# Altium PCB B212.PcbDoc
Units mm, origin at the board's own origin, x right, y up, seen from the top; angles counter-clockwise.
Board outline 40 x 22 mm, 4 copper layers (Top, Layer 1, Layer 2, Bottom), stack 1.564 mm thick; 17 components, 23 nets, 97 pads, 228 vias.
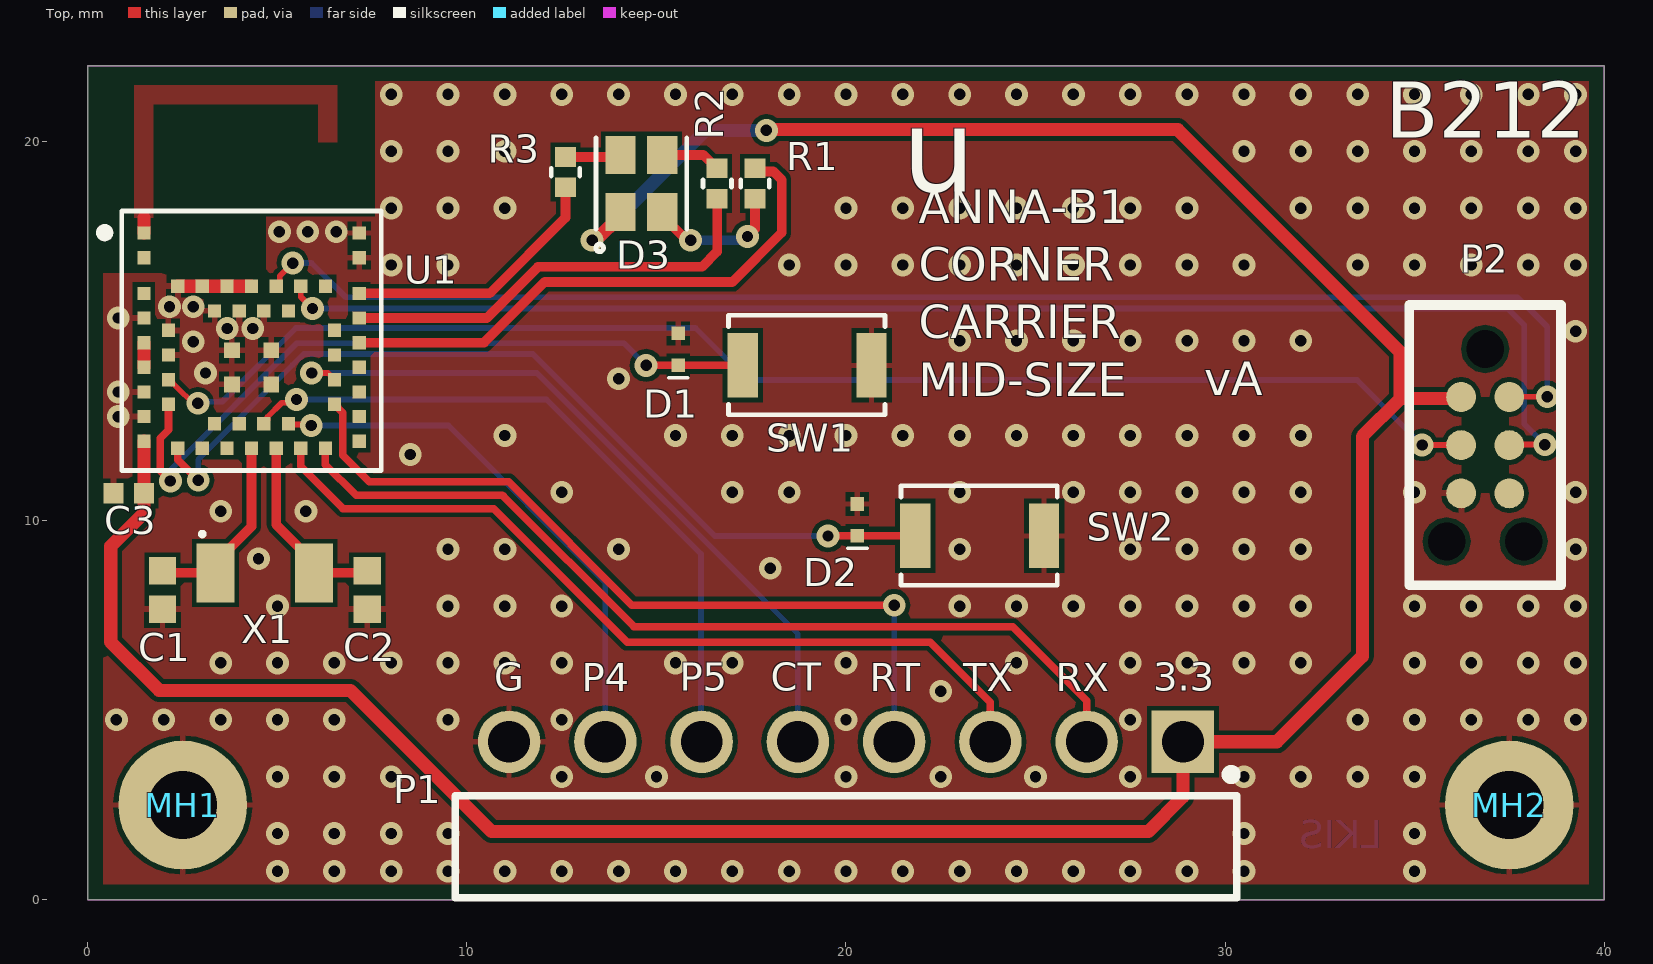
[diagram p0: Top view]
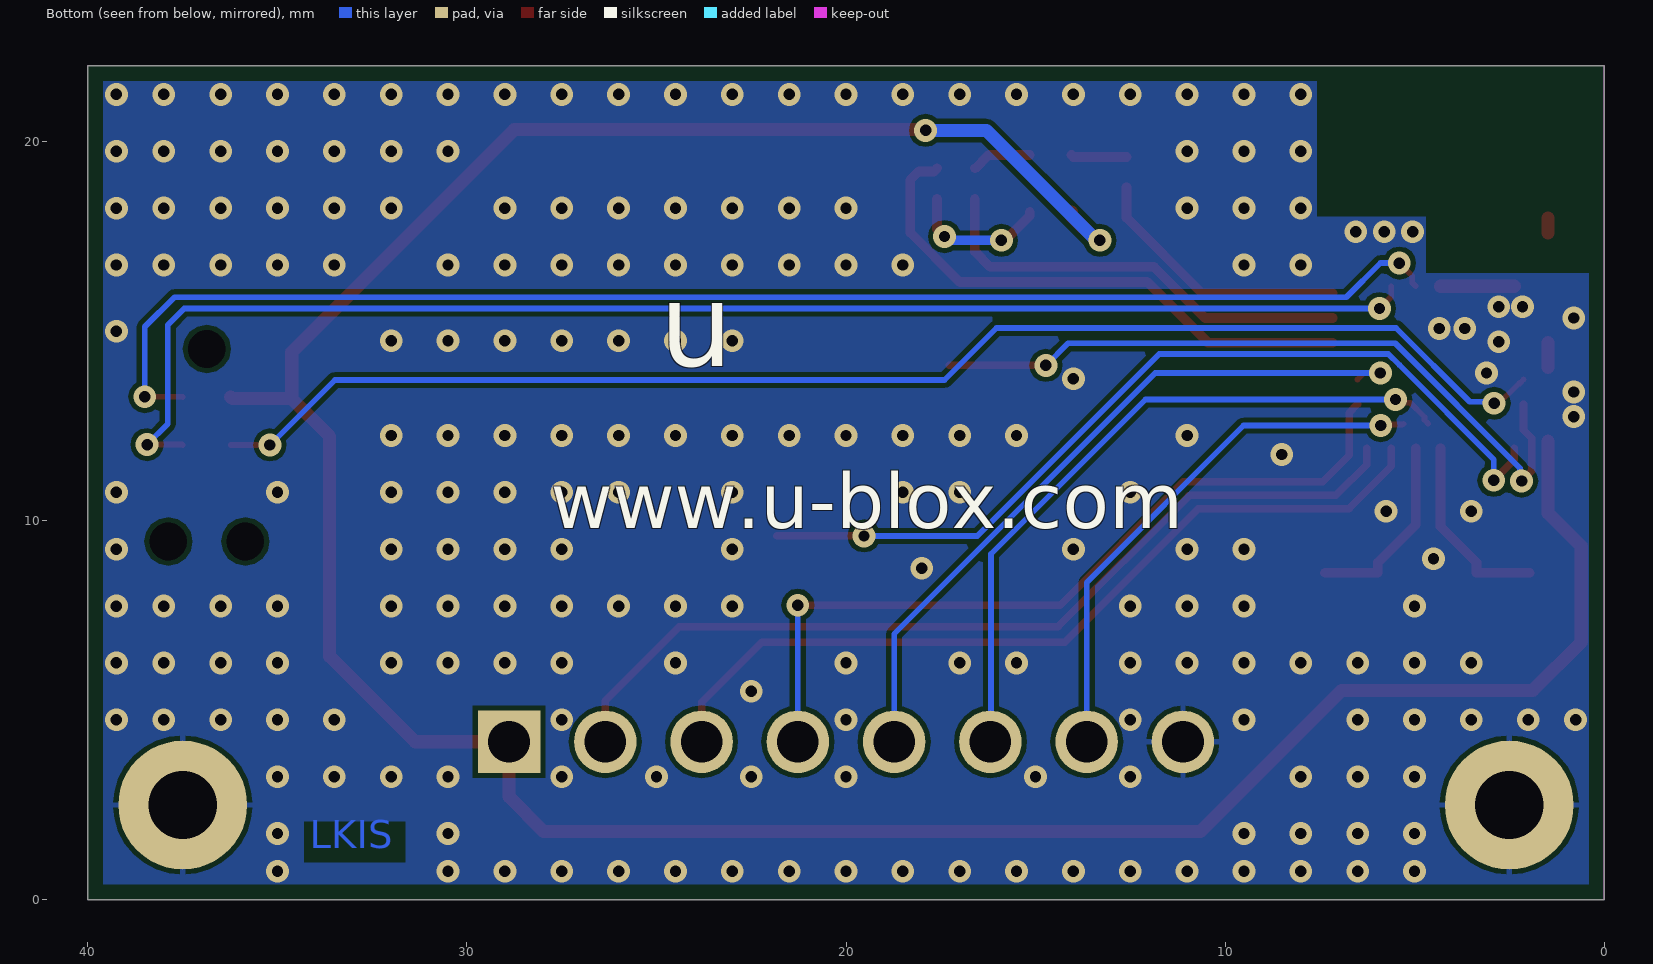
[diagram p1: Bottom view, seen from below]
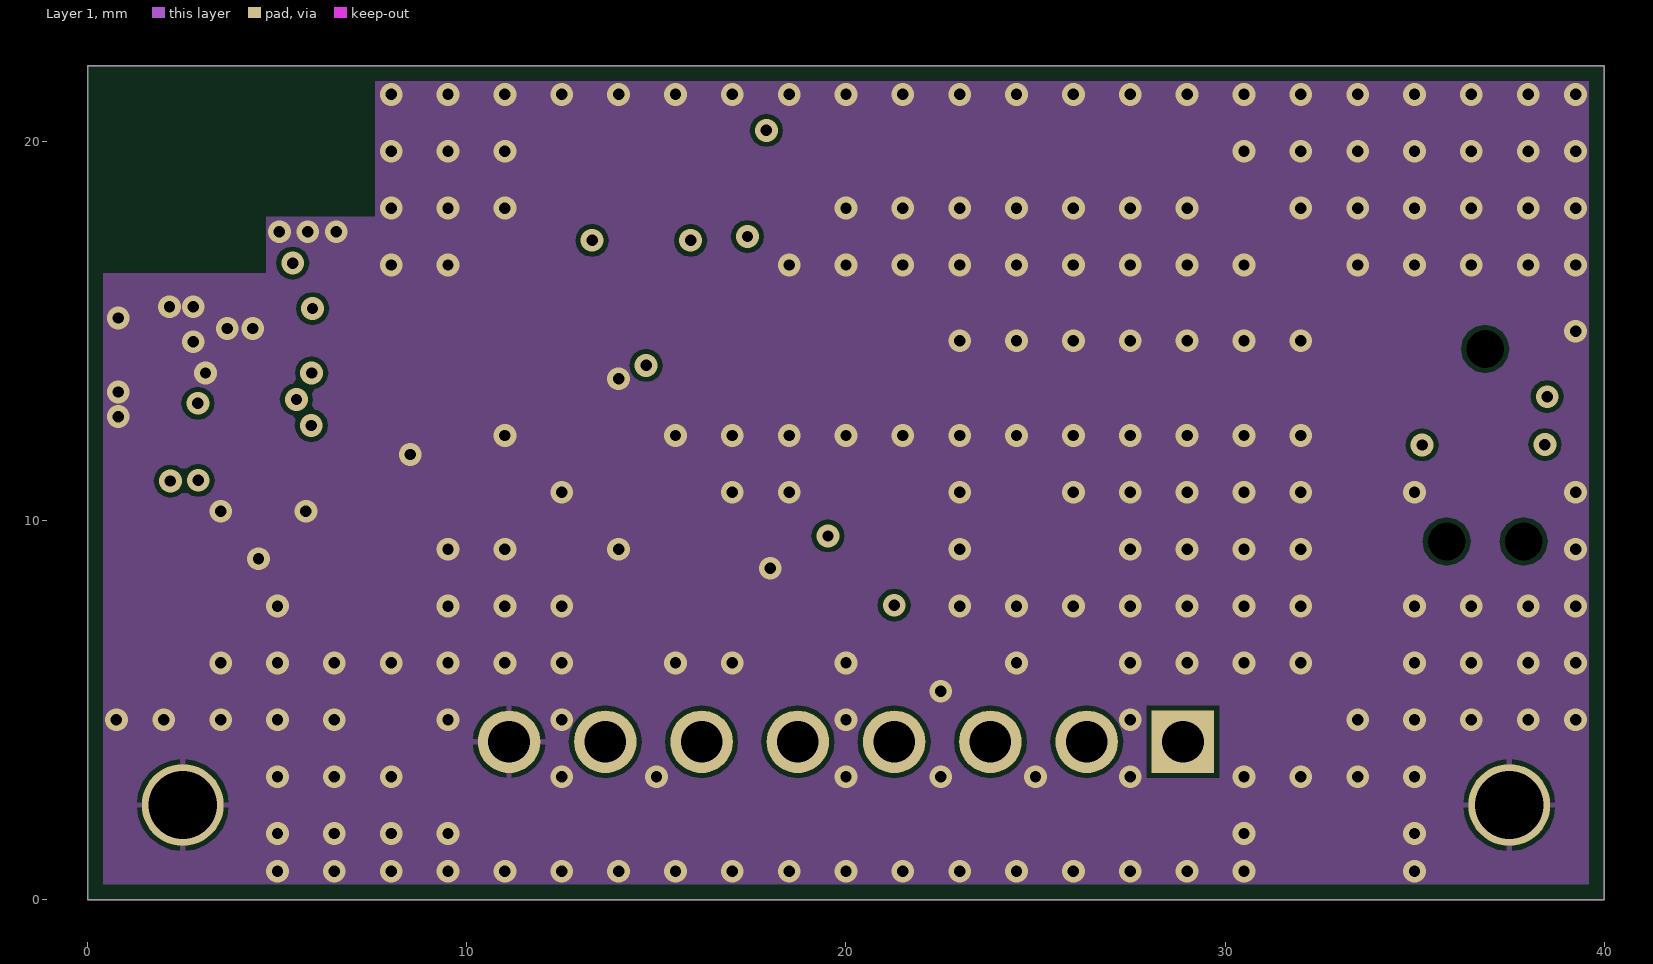
[diagram p2: Layer 1]
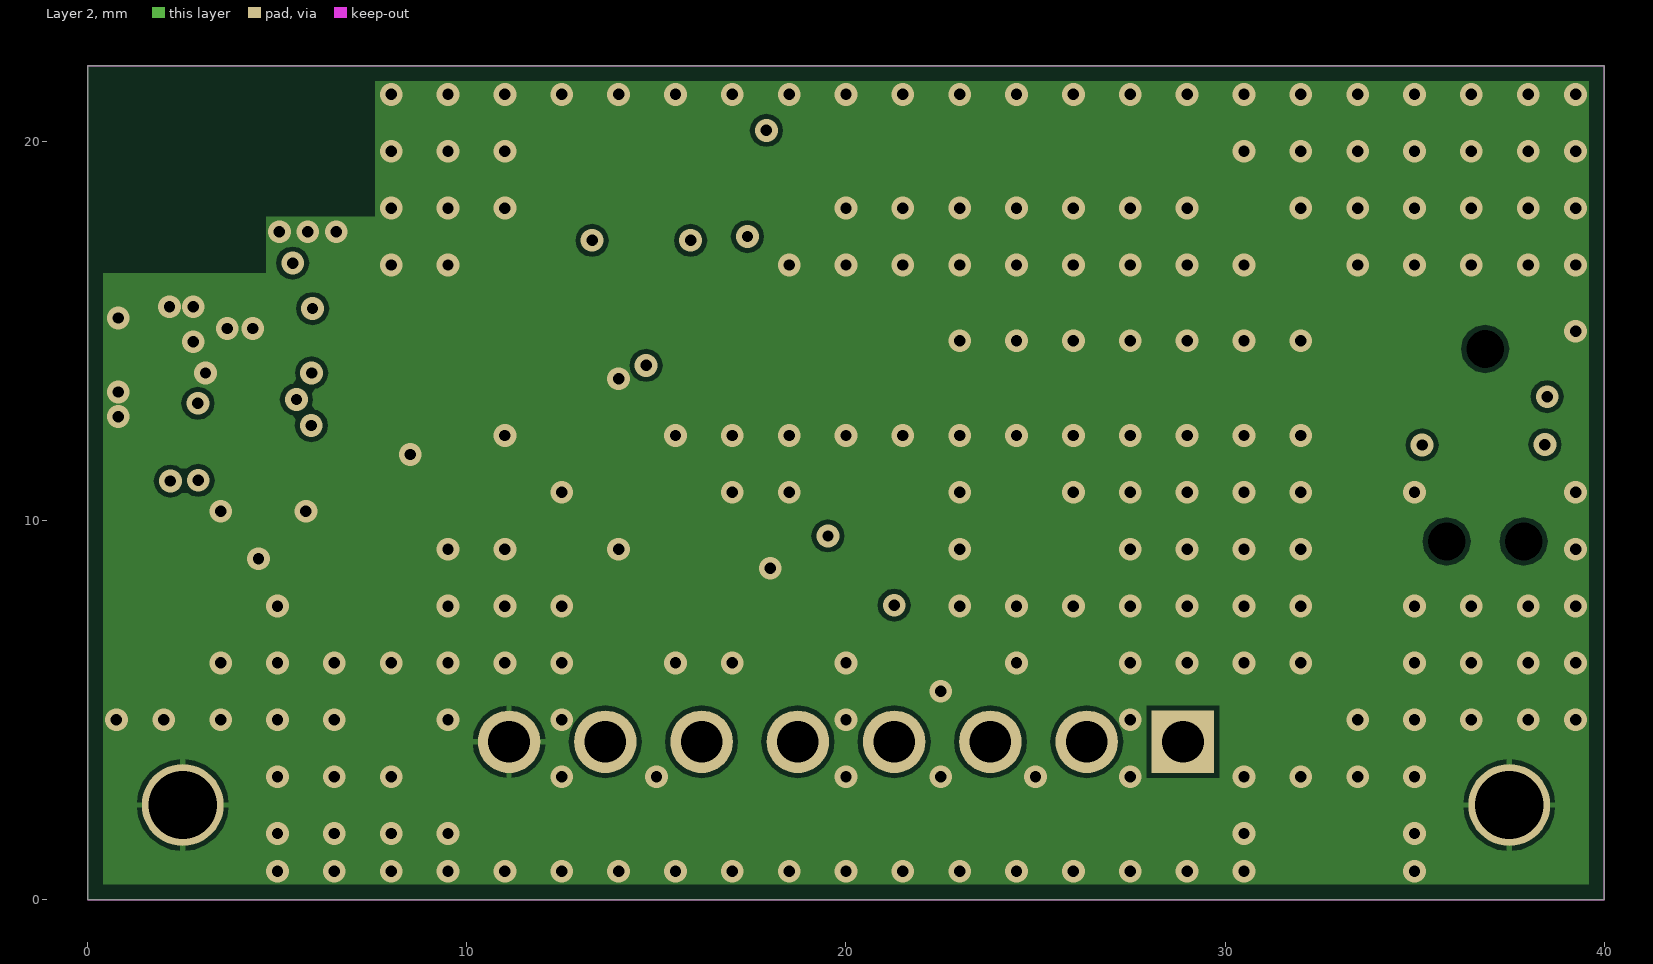
[diagram p3: Layer 2]

## Layer stack, top to bottom
Top Solder: solder mask 0.0203, Solder Resist, Dk 3.5
Top: signal copper 0.0406
Dielectric 1: prepreg 0.0711, PP-006, Dk 4.1
Layer 1: signal copper 0.035
Core: core 1.27, Core-043, Dk 4.3
Layer 2: signal copper 0.035
Dielectric 2: prepreg 0.0711, PP-006, Dk 4.1
Bottom: signal copper 0.0406
Bottom Solder: solder mask 0.0203, Solder Resist, Dk 3.5

## Board outline
0,22 40,22 40,0 0,0

## Design rules (kind name [scope] priority, off if disabled: settings)
BoardOutlineClearance [All] p1: gap=0.4 ignorepadtopadclearanceinfootprint=FALSE
Clearance "Stitching GND" [IsStitchingVia and InNet('GND') vs (IsVia and (Not IsStitchingVia)) Or IsPad] p1: gap=0.127 ignorepadtopadclearanceinfootprint=TRUE
Clearance Clearance_Poly [InPolygon vs OnLayer('Keep-Out Layer') OR (OnLayer('Multi-Layer') AND IsPad  AND Not(PadIsPlated))] p2: gap=0.127 ignorepadtopadclearanceinfootprint=TRUE
Clearance [All] p3: gap=0.127 ignorepadtopadclearanceinfootprint=FALSE except(0: Arc-Text Arc-Hole Track-Text Track-Hole SMDPad-Text SMDPad-Hole THPad-Text THPad-Hole Via-Text Via-Hole Fill-Text Fill-Hole Poly-Text Poly-Hole Region-Text Region-Hole Text-Text Text-Hole)
ComponentClearance [All] p1: gap=0.127 collisioncheckmode=3 verticalgap=0.254 showdistances=FALSE
DiffPairsRouting .14 [All] p1: maxlimit=0.254 minlimit=0.1 mostfreqgap=0.254 toplayer_maxgap=0.1 toplayer_prefgap=0.1 toplayer_minwidth=0.1 toplayer_maxwidth=0.1 toplayer_prefwidth=0.1 midlayer1_mingap=0.254 midlayer1_minwidth=0.381 midlayer1_maxwidth=0.381 midlayer1_prefwidth=0.381 midlayer2_mingap=0.254 midlayer2_minwidth=0.381 midlayer2_maxwidth=0.381 midlayer2_prefwidth=0.381 bottomlayer_maxgap=0.1 bottomlayer_prefgap=0.1 bottomlayer_minwidth=0.1 bottomlayer_maxwidth=0.1 bottomlayer_prefwidth=0.1 maxuncoupledlength=12.7
Height [All] p1: minheight=0 maxheight=25.4 prefheight=2.54
HoleSize [All] p1: absolutevalues=TRUE maxlimit=2540 minlimit=0.127 maxpercent=80.000 minpercent=20.000
HoleToHoleClearance [All] p1: gap=0.152 allowstackedmicrovias=TRUE
MinimumSolderMaskSliver [All] p1: minsoldermaskwidth=0.025
PlaneClearance [InPoly] p1: clearance=0.254
PlaneConnect [All] p1: pad.planeconnectstyle=Relief pad.reliefexpansion=0.508 pad.reliefentries=4 pad.reliefconductorwidth=0.254 pad.reliefairgap=0.254 via.planeconnectstyle=Direct via.reliefexpansion=0.508 via.reliefentries=4 via.reliefconductorwidth=0.254 via.reliefairgap=0.254
PolygonConnect ThermalVias [IsVia] p1: connectstyle=Direct reliefconductorwidth=0.254 reliefentries=4 polygonreliefangle="90 Angle" airgapwidth=0.254
PolygonConnect "PolygonConnect - Power" [InNetClass('')] p2: connectstyle=Relief reliefconductorwidth=0.254 reliefentries=4 polygonreliefangle="90 Angle" airgapwidth=0.127
PolygonConnect PolygonConnect-BGA [InComponentClass('')] p3: connectstyle=Relief reliefconductorwidth=0.152 reliefentries=4 polygonreliefangle="45 Angle" airgapwidth=0.152
PolygonConnect PolygonConnect-General [All] p4: connectstyle=Relief reliefconductorwidth=0.152 reliefentries=4 polygonreliefangle="90 Angle" airgapwidth=0.127
RoutingLayers [All] p1: top layer_v5=TRUE mid layer 1_v5=FALSE mid layer 2_v5=TRUE bottom layer_v5=TRUE
RoutingVias [All] p1: holewidth=0.3 width=0.6 viastyle="Through Hole" minholewidth=0.2 minwidth=0.5 maxholewidth=7 maxwidth=1
SMDEntry [All] p1 off: side=TRUE corner=TRUE anyangle=TRUE
SilkToBoardRegionClearance [All] p1 off:
SilkToSilkClearance [All] p1 off: silktosilkclearance=0.025
SilkToSolderMaskClearance [IsPad] p1 off: minsilkscreentomaskgap=0 clearancetoexposedcopper=TRUE
SolderMaskExpansion SolderMaskExpansion_via [IsVia] p1: expansion=-0.254 istentingtop=TRUE
SolderMaskExpansion [All] p2: expansion=0.05 istentingtop=FALSE
UnRoutedNet [All] p1: checkbadconnections=TRUE
ViasUnderSMD [All] p1: allowed=FALSE
Width [All] p1: maxlimit=2.54 minlimit=0.127 preferedwidth=0.152 toplayer_maxwidth=1 toplayer_prefwidth=0.152 bottomlayer_maxwidth=1 bottomlayer_prefwidth=0.152 minimp=50.000000 maximp=50.000000 favimp=50.000000
Width Width_1 [All] p2: maxlimit=0.254 minlimit=0.254 preferedwidth=0.254
17 further rules are at their usual default settings.

## Components (designator, comment, footprint, x,y, rotation, side; value= is the part's Value field where it differs from the comment)
C1 "Capacitor 10 pF +/- 5% 50 V 0402" CAPC1005X55X25ML05T05 1.965,8.175 r270 top value=10pF
C2 "Capacitor 10 pF +/- 5% 50 V 0402" CAPC1005X55X25ML05T05 7.365,8.175 r270 top value=10pF
C3 "UBXH01-00002434U7" "Cap 0402 HD" 1.075,10.725 r180 top value=4U7
D1 "110-00019" SOD-923 15.575,14.525 r90 top
D2 "110-00019" SOD-923 20.3,10.025 r90 top
D3 "115-00011" 4-PLCC 14.6,18.9 r270 top
MH1 "MH_M1.5DNP" MH_M1.5 2.5,2.5 r0 top
MH2 "MH_M1.5DNP" MH_M1.5 37.5,2.5 r0 top
P1 "61300811021" 61300811021 20,1.4 r0 top
P2 "TC2030-IDC-NLDNP" TC2030-IDC-NL 36.865,14.535 r270 top
R1 "180-00031499R" "RES 0402 HD" 17.6,18.9 r270 top value=499R
R2 "180-00098220R" "RES 0402 HD" 16.6,18.9 r90 top value=220R
R3 "180-00098220R" "RES 0402 HD" 12.6,19.2 r90 top value=220R
SW1 "135-00007" B3U-1000P 18.975,14.1 r0 top
SW2 "135-00007" B3U-1000P 23.525,9.6 r0 top
U1 "ANNA-B112-OPENCPU" ANNA_LGA52S_650X650 4.315,14.752 r0 top
X1 "100-00005" XTAL_3215 4.665,8.625 r0 top

## Footprints (in the part's own frame and the unit in brackets; to place one, negate y for a bottom-side part, rotate by r counter-clockwise, add the part's x,y. Pads: shape width x height; smd on the part's side, far side on the other; paste and mask are expansions set on the pad)
4-PLCC [mm] "4 Pin Plastic Leaded Chip Carrier, 2mm x 2mm"
  rect 1x0.8 smd: 1(0.75,-0.55) 2(-0.75,-0.55) 3(-0.75,0.55) 4(0.75,0.55)
  silkscreen extent -1.2,-1.2 1.8,1.2, body extent -1.05,-1.05 1.05,1.05, height 1.01
61300811021 [mm]
  rect 1.65x1.65 hole 1.1: 1(8.89,2.77)
  round 1.65 hole 1.1: 2(6.35,2.77) 3(3.81,2.77) 4(1.27,2.77) 5(-1.27,2.77) 6(-3.81,2.77) 7(-6.35,2.77) 8(-8.89,2.77)
  silkscreen extent -10.31,-1.35 10.31,2.03, body extent -10.16,-7.27 10.16,3.09, height 2.58
ANNA_LGA52S_650X650 [mm]
  rect 0.35x0.35 smd paste+0 mask+0.05: 1(-2.84,2.84) 2(-2.84,2.19) 3(-2.84,1.248) 4(-2.84,0.598) 5(-2.84,-0.052) 6(-2.84,-0.702) 7(-2.84,-1.352) 8(-2.84,-2.002) 9(-2.84,-2.652) 10(-2.19,0.273) 11(-2.19,-0.377) 12(-2.19,-1.027) 13(-2.19,-1.677) 14(-1.95,-2.84) 15(-1.3,-2.84) 17(0,-2.84) 18(0.65,-2.84) 20(1.95,-2.84) 21(-0.975,-2.19) 23(0.325,-2.19) 24(0.975,-2.19) 25(2.84,-2.652) 26(2.84,-2.002) 27(2.84,-1.352) 28(2.84,-0.702) 29(2.84,-0.052) 30(2.84,0.598) 31(2.84,1.248) 32(2.84,2.19) 33(2.84,2.84) 34(2.19,-1.677) 35(2.19,-1.027) 36(2.19,-0.377) 37(2.19,0.273) 38(1.95,1.435) 39(1.3,1.435) 40(0.65,1.435) 41(0,1.435) 42(-0.65,1.435) 43(-1.3,1.435) 44(-1.95,1.435) 46(0.325,0.785) 48(-0.975,0.785)
  rect 0.35x0.35 smd mask+0.05: 16(-0.65,-2.84) 19(1.3,-2.84) 22(-0.325,-2.19) 45(0.975,0.785) 47(-0.325,0.785)
  rect 0.42x0.42 smd paste+0 mask+0.05: 49(-0.52,-0.252) 50(-0.52,-1.152) 51(0.52,-1.152) 52(0.52,-0.252)
  silkscreen extent -3.97,-3.42 3.42,3.43, body extent -3.25,-3.25 3.25,3.25, height 1.2
B3U-1000P [mm] "Button Tactile, SMT 4mm x 2.5mm, height 1.2mm"
  rect 0.8x1.7 smd: 1(-1.7,0) 2(1.7,0)
  silkscreen extent -2.07,-1.3 2.05,1.33, body extent -2,-1.25 2,1.25, height 1.6
"Cap 0402 HD" [mm] "Chip Capacitor, 2-Leads, Body 1.00x0.50mm, IPC High Density"
  rect 0.52x0.55 smd: 1(-0.4,0) 2(0.4,0)
  body extent -0.55,-0.3 0.55,0.3, height 0.6
CAPC1005X55X25ML05T05 [mm] "Chip Capacitor, 2-Leads, Body 1.05x0.55mm, IPC Low Density"
  rect 0.72x0.72 smd: 1(-0.51,0) 2(0.51,0)
  body extent -0.53,-0.28 0.53,0.28, height 0.55
MH_M1.5 [mm] "Mounting Hole M1.5 Metric, 3.4mm diameter pad"
  round 3.4 / inner round 2.159 / far side round 3.4 hole 1.8: 1(0,0)
"RES 0402 HD" [mm] "Chip Resistor, 2-Leads, Body 1.05x0.54mm, IPC High Density"
  rect 0.52x0.55 smd: 1(-0.4,0) 2(0.4,0)
  silkscreen extent -0.1,-0.38 0.1,0.38, body extent -0.55,-0.3 0.55,0.3, height 0.4
SOD-923 [mm] "SOD-923, 2-Leads, Body 1.25x2.50mm, IPC High Density,"
  rect 0.36x0.35 smd mask+0.05: 1(-0.42,0) 2(0.42,0)
  silkscreen extent -0.75,-0.25 -0.75,0.25, body extent -0.4,-0.3 0.4,0.3, height 0.4
TC2030-IDC-NL [mm] "Tag-Connect 6-Pin No Legs"
  round 0.9 hole 0.995 unplated: 0(0,0) 0(5.08,-1.016) 0(5.08,1.016)
  round 0.79 smd paste-0.39: 1(1.27,-0.635) 2(1.27,0.635) 3(2.54,-0.635) 4(2.54,0.635) 5(3.81,-0.635) 6(3.81,0.635)
  silkscreen extent -1.16,-2 6.24,2
XTAL_3215 [mm] "XTAL, 2-Leads, Body 1.50x3.20mm"
  rect 1x1.55 smd: 1(-1.3,0) 2(1.3,0)
  silkscreen extent -1.7,0.98 -1.6,1.07, body extent -1.65,-0.8 1.65,0.8, height 0.9

## Part data
C1 C2: library part CMP-001-00013-4, "Chip Capacitor, 10 pF, +/- 5%, 50 V, 0402 (1005 Metric)", Capacitor Type=Ceramic, Case/Package=0402, Max Operating Temperature=125°C, Min Operating Temperature=-55°C, Tolerance=5%, Voltage Rating=50V, Mounting Technology=SM, Pins=2, RoHS Compliant=True
C3: library part UBXH01-0000243, "CAP CER X5R 0402", Manufacturer="Murata Manufacturing Company, Ltd.", Manufacturer 2=None, Manufacturer P/N=GRM155R61A475MEAA, Max Operating Temp=85°C, Max Voltage=10.0V, Min Operating Temp=-40°C, Tolerance=20%, Automotive=None, Critical=None, Editor=dario.antonaz, Env=ROHS, Manufacturer 3=None, Manufacturer P/N 2=None, Manufacturer P/N 3=None, Max Current=None, Max Power=None, Mfg P/N Datasheet=https://wiki.u-blox.com/bin/view/Generic/Docs/DocumentSummary?index=24302, Mfg P/N Datasheet 2=None, Mfg P/N Datasheet 3=None, Mfg P/N Released=Yes, Mfg P/N Released 2=None, Mfg P/N Released 3=None, Mfg P/N Split=100, Mfg P/N Split 2=None, Mfg P/N Split 3=None, Mfg P/N Status=Active, Mfg P/N Status 2=None, Mfg P/N Status 3=None, Part Number=UBXH01-0000243, Part Type=Capacitor, Perferred=PREF, Permitted Use="Volume Products", RefDes=C, Release Data="2016-03-17 10:02:21.014314", Released by=pasquale.scorca, Single Source=None, Size=0x0y, UBX Wiki=https://wiki.u-blox.com/bin/view/Operations/PartDetails?index=24303
D1 D2: "Diode, ESD9B, 3.3V, ST5G, SOD-923", Manufacturer="ON Semiconductor", Manufacturer P/N=ESD9B3.3ST5G, MFG Package=SOD-923, Package Type=SOD, Part Name="Diode TVS 3.3V SOD-923", Voltage=3.3V, Arena Link=https://app.bom.com/a/4M5DJQ9Q9SR7DV4H?v=spec.summary, Body Size="0.8mm x 0.6mm", Component Mounting Type=SMT, Diode Type=TVS, Height=0.4mm, Item_Phase=Production, Part Number=110-00019, Part_Type=Diode, Pins=2, Revision=0A, Supplier 1=Arrow, Supplier Part Number 1=ESD9B3.3ST5G, Use in new designs=Yes
D3: "LED, RGB Diffused SMT, PLCC4 4 Pin", Color=RGB, Current="20mA Red, 10mA Green, 10mA, Blue", Manufacturer="Cree, Inc.", Manufacturer P/N=CLMVB-FKA-CFHEHLCBB7a363, MFG Package=PLCC4, Package Type=Custom, Part Name="LED RGB SMT 2mm x 2mm", Supplier Part Number 1=941-CLMVBFKACFHEHLCB, Voltage=5V, Arena Link=https://app.bom.com/a/UCV39GZGZIHY581D?v=spec.summary, Body Size="2.0mm x 2.0mm", Component Mounting Type=SMT, Height=1mm, Item_Phase=Production, Mounting Type=Vertical, Number of Circuits=3, Part Number=115-00011, Part_Type=LED, Pins=4, Revision=0A, Supplier 1=Mouser, Use in new designs=Yes, Vf="2V Red, 3V Green, 3V Blue"
MH1 MH2: library part MH_M1.5, "1.5M screw mounting hole, plated", Added By="Jeremy D", Added Date=7/9/2015, DNP=DNP, Height=0mm, Part Number=MH_M1.5, Size="3.4mm x 3.4mm", Type="Mounting Hole"
P1: library part CMP-1502-01075-1, "THT Angled Pin Header WR-PHD, Pitch 2.54 mm, Single Row, 8 pins", Contact Resistance=20mOhm, Manufacturer="Wurth Electronics", Operating Temperature=-40to105degC, Rated Current=3A, Withstanding Voltage=500VAC, Working Voltage=250VAC, Datasheet URL=https://katalog.we-online.de/em/datasheet/6130xx11021.pdf, Gender=Male, Manufacturer Part Number=61300811021, Manufacturer URL=http://www.we-online.de, Mounting Technology=THT, Orientation=Angled, Package Reference=61300811021, Packaging=Bag, Part Number=61300811021, Pin Number=8, Pitch=2.54mm, Publisher=WurthElektronik, Row Number=Single
P2: library part TC2030-IDC-NL, "CON PADS FOR CBL PLUG-OF-NAILS 6-PIN NO LEGS", Manufacturer="TAG Connect", Added By="Paul B", Added Date=4/22/2015, DNP=DNP, Height=0, Manufacturer P/N=TC2030-IDC-NL, Part Number=TC2030-IDC-NL, Size="6.731mm x 12.446mm"
R1: library part 180-00031, "Resistor, 499ohm, 1%, 1/16W, 0402", Manufacturer="Rohm Semiconductor", Manufacturer 2="Samsung Electro-Mechanics America, Inc", Manufacturer P/N=MCR01MRTF4990, Manufacturer P/N 2=RC1005F4990CS, Part Name="RES SMD 499 OHM 1% 1/16W 0402", Power=1/16W, Supplier Part Number 1=RHM499CDCT-ND, Tolerance="+/- 1%", Alternate Footprint Ref="RES 0402", Arena Link=https://app.bom.com/a/Q8RZ5CVCVEDU1SS5?v=spec.summary, Component Mounting Type=SMT, Height=0.4mm, Item_Phase=Production, Part Number=180-00031, Part_Type=Resistor, Pins=2, Revision=0D, Size=0402, Supplier 1=Digi-Key, Supplier 2=Digi-Key, Supplier Part Number 2=1276-3992-1-ND, Use in new designs=Yes
R2 R3: library part 180-00098, "Resistor, 220ohm, 5%, 1/16W, 0402.", Manufacturer="Panasonic Electronic Components", Manufacturer 2="Samsung Electro-Mechanics America, Inc", Manufacturer P/N=ERJ-2GEJ221X, Manufacturer P/N 2=RC1005J221CS, Part Name="RES SMD 220 OHM 5% 1/16W 0402", Power=1/16W, Supplier Part Number 1=P220JCT-ND, Tolerance="+/- 5%", Alternate Footprint Ref="RES 0402", Arena Link=https://app.bom.com/a/8Q9HNUDUDWVBJC30?v=spec.summary, Component Mounting Type=SMT, Height=0.4mm, Item_Phase=Production, Part Number=180-00098, Part_Type=Resistor, Pins=2, Revision=0C, Size=0402, Supplier 1=Digi-Key, Supplier 2=Digi-Key, Supplier Part Number 2=1276-4360-1-ND, Use in new designs=Yes
SW1 SW2: "Button, Momentary SPST-NO, 0.05A, 12V, 3mm x 2.5mm", Current=50mA, Manufacturer="Omron Electronics Inc-EMC Div", Manufacturer P/N=B3U-1000P, Part Name="SWITCH TACTILE SPST-NO 0.05A 12V", Supplier Part Number 1=SW1020CT-ND, Voltage=12VDC, Arena Link=https://app.bom.com/a/TBU28FYFYHGV5FQ0?v=spec.summary, Body Size="3mm x 2.5mm", Component Mounting Type=SMT, Height=1.2mm, Item_Phase=Production, Part Number=135-00007, Part_Type=Button, Pins=2, Revision=0A, Supplier 1=Digi-Key, Switch/Button Circuit=SPST, Switch/Button Function=Off-Mom, Use in new designs=Yes
U1: "u-blox ANNA-B112 Bluetooth 5 LE module", Manufacturer=u-blox, Part Description="Stand-alone Bluetooth low energy module"
X1: "XTAL, 2Pin, 32.768kHz, 7pF 20ppm", Frequency=32.768kHz, Frequency Tolerance=20ppm, Manufacturer=Epson, Manufacturer 2="AVX Corporation", Manufacturer P/N="FC-135 32.7680KA-AG3", Manufacturer P/N 2=ST3215SB32768C0HPWBB, MFG Package=2-SMD, Part Name="XTAL 32.768kHz 7pF 20ppm 3215", Supplier Part Number 1=SER4086CT-ND, Arena Link=https://app.bom.com/a/L3MU07Q7Q98O5PC8?v=spec.summary, Body Size="3.2mm x 1.5mm", CL=7pF, Component Mounting Type=SMT, Height=0.9mm, Item_Phase=Production, Part Number=100-00005, Part_Type=Crystal/Oscillator, Pins=2, Revision=0C, Supplier 1=Digi-Key, Supplier 2=Digi-Key, Supplier Part Number 2=1253-1113-1-ND, Use in new designs=Yes

## Via types
v1: diameter 0.6, hole 0.3, Top to Bottom, tented both sides, 228 vias

## Nets (pads, with @x,y where several pads share a name; then routed paths per layer and width w, separated by ;. In a path a pad name is that pad's centre, name@x,y a point inside that pad or via, vN(x,y) a via of type N, cw(c..) or ccw(c..) an arc to the next point about the centre after c; other vN are vias at no path point)
3V3: C3.1 D3.1 P1.1 P2.1 U1.9 | length 79.8
  Top w0.35: U1.9 C3.1 1.475,10.2 0.6,9.325 0.6,6.8 1.875,5.525 6.925,5.525 10.65,1.8 27.975,1.8 28.89,2.715 P1.1 31.37,4.17 33.625,6.425 33.625,12.225 34.625,13.225 ; v1@13.3,17.3 v1(13.3,17.4) 13.4,17.4 14.05,18.05 D3.1 ; v1@17.9,20.323 28.752,20.323 34.625,14.45 34.625,13.225 ; P2.1 36.19,13.225 34.625,13.225
  Bottom w0.35: v1(13.3,17.4) 13.4,17.4 16.3,20.3 v1(17.9,20.3)
ANT_HOST_CORNER: U1.1 | length 0.4
  Top w0.35: U1.1 1.475,17.992
ANT_INT_CORNER: U1.5 U1.6 | length 0.6
  Top w0.35: U1.6 U1.5
BLUE: R3.1 U1.31 | length 7.1
  Top w0.254: U1.31 10.6,16 12.6,18 R3.1
BUTTON1: D1.1 SW1.1 U1.13 | length 19.3
  Top w0.2: U1.13 2.125,12.399 1.902,12.176 1.902,11.323 v1(2.175,11.05) ; v1(14.725,14.1) 14.727,14.102 15.573,14.102 D1.1 17.27,14.105 SW1.1
  Bottom w0.152: v1(2.175,11.05) 2.214,11.089 2.214,11.389 5.507,14.682 14.143,14.682 v1(14.725,14.1)
BUTTON2: D2.1 SW2.1 U1.14 | length 23.7
  Top w0.152: v1(19.525,9.6) v1@19.527,9.603 ; D2.1@20.298,9.603 D2.1 20.3,9.6 D2.1@20.305,9.605 ; SW2.1@21.82,9.605 SW2.1
  Top w0.2: U1.14 2.365,11.61 v1(2.908,11.067) ; v1@19.527,9.603 D2.1@20.298,9.603 ; D2.1@20.305,9.605 SW2.1@21.82,9.605
  Bottom w0.152: v1(2.908,11.067) 2.908,11.619 5.397,14.108 5.692,14.403 11.734,14.403 16.537,9.6 v1(19.525,9.6)
CLK1: C1.1 U1.17 X1.1 | length 5.1
  Top w0.254: C1.1@1.965,8.625 X1.1 3.365,8.9 4.315,9.85 U1.17
CLK2: C2.1 U1.18 X1.2 | length 5.1
  Top w0.254: U1.18 4.965,9.9 5.965,8.9 X1.2 C2.1@7.365,8.625
CTS: P1.5 U1.35 | length 19.2
  Top w0.152: v1(5.9,13.9) 6.33,13.9 U1.35
  Bottom w0.152: v1(5.9,13.9) 11.842,13.9 18.73,7.012 P1.5
GND: C1.2 C2.2 C3.2 D1.2 D2.2 MH1.1 MH2.1 P1.8 P2.5 SW1.2 SW2.2 U1.4 U1.7 U1.8 U1.10 U1.11 U1.32 U1.33 U1.41 U1.42 U1.43 U1.44 U1.46 U1.47 U1.48 U1.49 U1.50 U1.51 U1.52 | length 2
  Top w0.35: U1.44 U1.43 U1.42 U1.41 ; v1(2.775,15.65) v1@2.805,15.68
  other v1: 5,0.75 6.5,0.75 8,0.75 9.5,0.75 11,0.75 12.5,0.75 14,0.75 15.5,0.75 17,0.75 18.5,0.75 20,0.75 21.5,0.75 23,0.75 24.5,0.75 26,0.75 27.5,0.75 29,0.75 30.5,0.75 35,0.75 5,1.75 6.5,1.75 8,1.75 9.5,1.75 30.5,1.75 35,1.75 5,3.25 6.5,3.25 8,3.25 12.5,3.25 15,3.25 20,3.25 22.5,3.25 25,3.25 27.5,3.25 30.5,3.25 32,3.25 33.5,3.25 35,3.25 0.75,4.75 2,4.75 3.5,4.75 5,4.75 6.5,4.75 9.5,4.75 12.5,4.75 20,4.75 27.5,4.75 33.5,4.75 35,4.75 36.5,4.75 38,4.75 39.25,4.75 22.5,5.5 3.5,6.25 5,6.25 6.5,6.25 8,6.25 9.5,6.25 11,6.25 12.5,6.25 15.5,6.25 17,6.25 20,6.25 24.5,6.25 27.5,6.25 29,6.25 30.5,6.25 32,6.25 35,6.25 36.5,6.25 38,6.25 39.25,6.25 5,7.75 9.5,7.75 11,7.75 12.5,7.75 23,7.75 24.5,7.75 26,7.75 27.5,7.75 29,7.75 30.5,7.75 32,7.75 35,7.75 36.5,7.75 38,7.75 39.25,7.75 18,8.75 4.5,9 9.5,9.25 11,9.25 14,9.25 23,9.25 27.5,9.25 29,9.25 30.5,9.25 32,9.25 39.25,9.25 3.5,10.25 5.75,10.25 12.5,10.75 17,10.75 18.5,10.75 23,10.75 26,10.75 27.5,10.75 29,10.75 30.5,10.75 32,10.75 35,10.75 39.25,10.75 8.5,11.75 11,12.25 15.5,12.25 17,12.25 18.5,12.25 20,12.25 21.5,12.25 23,12.25 24.5,12.25 26,12.25 27.5,12.25 29,12.25 30.5,12.25 32,12.25 0.8,12.75 0.8,13.4 14,13.75 3.1,13.9 2.775,14.725 23,14.75 24.5,14.75 26,14.75 27.5,14.75 29,14.75 30.5,14.75 32,14.75 39.25,15 3.675,15.075 4.35,15.075 0.8,15.35 2.15,15.646 8,16.75 9.5,16.75 18.5,16.75 20,16.75 21.5,16.75 23,16.75 24.5,16.75 26,16.75 27.5,16.75 29,16.75 30.5,16.75 33.5,16.75 35,16.75 36.5,16.75 38,16.75 39.25,16.75 5.05,17.625 5.8,17.625 6.55,17.625 8,18.25 9.5,18.25 11,18.25 20,18.25 21.5,18.25 23,18.25 24.5,18.25 26,18.25 27.5,18.25 29,18.25 32,18.25 33.5,18.25 35,18.25 36.5,18.25 38,18.25 39.25,18.25 8,19.75 9.5,19.75 11,19.75 30.5,19.75 32,19.75 33.5,19.75 35,19.75 36.5,19.75 38,19.75 39.25,19.75 8,21.25 9.5,21.25 11,21.25 12.5,21.25 14,21.25 15.5,21.25 17,21.25 18.5,21.25 20,21.25 21.5,21.25 23,21.25 24.5,21.25 26,21.25 27.5,21.25 29,21.25 30.5,21.25 32,21.25 33.5,21.25 35,21.25 36.5,21.25 38,21.25 39.25,21.25
GREEN: R2.1 U1.30 | length 11.6
  Top w0.254: U1.30 10.524,15.35 11.874,16.7 16.2,16.7 16.6,17.1 R2.1
NetD3_2: D3.2 R3.2 | length 1.5
  Top w0.254: R3.2 14,19.6 D3.2
NetD3_3: D3.3 R2.2 | length 1.6
  Top w0.254: D3.3 16.235,19.65 16.585,19.3 R2.2
NetD3_4: D3.4 R1.2 | length 3.7
  Top w0.254: D3.4 15.15,18.05 15.8,17.4 v1(15.9,17.4) ; v1(17.4,17.5) 17.6,17.7 R1.2
  Bottom w0.254: v1(15.9,17.4) 17.3,17.4 v1(17.4,17.5)
nRESET: P2.3 U1.12 | length 36.6
  Top w0.152: U1.12 2.224,13.626 2.246,13.626 2.872,13 2.9,13.028 v1(2.9,13.1) ; v1(35.2,12) 35.203,11.997 36.228,11.997 P2.3
  Bottom w0.152: v1(2.9,13.1) 2.942,13.142 3.542,13.142 5.488,15.088 16.027,15.088 17.399,13.716 33.484,13.716 v1(35.2,12)
P0.04: P1.7 U1.24 | length 14.3
  Top w0.152: U1.24 5.314,12.538 5.867,12.538 v1(5.891,12.514)
  Bottom w0.152: v1(5.891,12.514) 9.511,12.514 13.65,8.375 P1.7
P0.05: P1.6 U1.23 | length 18.5
  Top w0.152: U1.23 4.739,12.661 4.739,12.739 5.114,13.114 5.414,13.114 v1(5.5,13.2)
  Bottom w0.152: v1(5.5,13.2) 12.098,13.2 16.175,9.123 16.175,4.185 P1.6
RED: R1.1 U1.29 | length 14.6
  Top w0.254: U1.29 10.448,14.7 12.048,16.3 17,16.3 18.3,17.6 18.3,19 18.083,19.217 17.683,19.217 R1.1
RTS: P1.4 U1.34 | length 21.2
  Top w0.2: U1.34 6.725,12.855 6.725,11.725 7.425,11.025 11.098,11.025 14.35,7.772 v1(21.273,7.772)
  Bottom w0.152: P1.4 21.273,4.172 v1(21.273,7.772)
RXD: P1.2 U1.20 | length 24.2
  Top w0.152: 10.934,10.673 10.986,10.673
  Top w0.2: U1.20 6.265,11.485 7.077,10.673 10.934,10.673 14.407,7.2 24.4,7.2 26.35,5.25 P1.2
SWCLK: P2.4 U1.39 | length 37.2
  Top w0.152: U1.39 5.615,15.91 v1(5.925,15.6) ; P2.4 37.515,12.01 v1(38.44,12.01)
  Bottom w0.152: v1(5.925,15.6) 37.461,15.6 37.897,15.164 37.897,12.553 v1(38.44,12.01)
SWDIO: P2.2 U1.40 | length 37.4
  Top w0.152: U1.40 5.06,16.282 5.06,16.46 v1(5.4,16.8) ; P2.2 37.505,13.27 38.495,13.27 v1(38.5,13.275)
  Bottom w0.152: v1(5.4,16.8) 5.9,16.8 6.8,15.9 37.719,15.9 38.5,15.119 v1(38.5,13.275)
TXD: P1.3 U1.19 | length 22.3
  Top w0.2: U1.19 5.615,11.435 6.729,10.321 10.704,10.321 14.225,6.8 22.225,6.8 23.81,5.215 P1.3
pads on no net: P2.0 P2.6 U1.2 U1.3 U1.15 U1.16 U1.21 U1.22 U1.25 U1.26 U1.27 U1.28 U1.36 U1.37 U1.38 U1.45

## Polygon pours and split planes (outlines as drawn)
ANT_HOST_CORNER on Top "ANT_HOST_CORNER_L01_P013" (solid, pour order 13): 1.725,17.992 1.225,17.992 1.225,21.492 6.575,21.492 6.575,19.992 6.075,19.992 6.075,20.992 1.725,20.992
GND on Top "GND_L01_P015" (solid, remove dead copper, pour order 15): 0,0 0,16.525 4.7,16.525 4.7,18.025 7.575,18.025 7.575,22 40,22 40,0 0,0
GND on Bottom "GND_L04_P014" (solid, remove dead copper, pour order 14): 0.005,0.004 0.005,16.529 4.705,16.529 4.705,18.029 7.58,18.029 7.58,22.004 40.005,22.004 40,0
GND on Layer 1 "GND_L02_P016" (solid, remove dead copper, pour order 16): 0,0 0,16.525 4.7,16.525 4.7,18.025 7.575,18.025 7.575,22 40,22 40,0 0,0
GND on Layer 2 "GND_L03_P017" (solid, remove dead copper, pour order 17): 0,0 0,16.525 4.7,16.525 4.7,18.025 7.575,18.025 7.575,22 40,22 40,0 0,0

## Keep-outs
Keep-Out Layer:
  the board outline again, w0.025

## Other copper
Top:
  pour cut-out: 36.6,13.275 37.125,13.275 37.5,12.9 37.5,11.075 37.15,10.725 36.575,10.725 36.23,11.07 36.23,12.905 36.3,12.975
Bottom:
  pour cut-out: 31.623,0.991 31.623,2.057 34.29,2.057 34.29,0.991
  text "LKIS" at 34.145,1.113 h1.27

## Silkscreen, mask and mechanical layers (free items; w line width, h text height)
Top Overlay:
  text "B212" at 34.239,19.62 h2.54
  text "u" at 21.489,17.954 h3.81
  text "vA" at 29.45,13.025 h1.52
  text "ANNA-B1 / CORNER / CARRIER / MID-SIZE" at 21.925,13 h1.52
  text "G" at 10.724,5.263 h1.27
  text "P5" at 15.618,5.263 h1.27
  text "CT" at 18.009,5.263 h1.27
  text "3.3" at 28.111,5.265 h1.27
  text "P4" at 13.022,5.25 h1.27
  text "RT" at 20.625,5.25 h1.27
  text "TX" at 23.092,5.25 h1.27
  text "RX" at 25.535,5.25 h1.27
Bottom Overlay:
  text "u" at 24.911,13.348 h3.81
  text "www.u-blox.com" at 27.796,9.31 h2.5
Route Tool Path:
  the board outline again, w0.127